# Altium PCB Mesanin.PcbDoc (part 2 of 2)
Units mm, origin at the board's own origin, x right, y up, seen from the top; angles counter-clockwise.
Board outline 85.5 x 78 mm, 4 copper layers (Top Layer, GND, UCCio, UCC), stack 0.602 mm thick; 40 components, 123 nets, 448 pads, 167 vias.
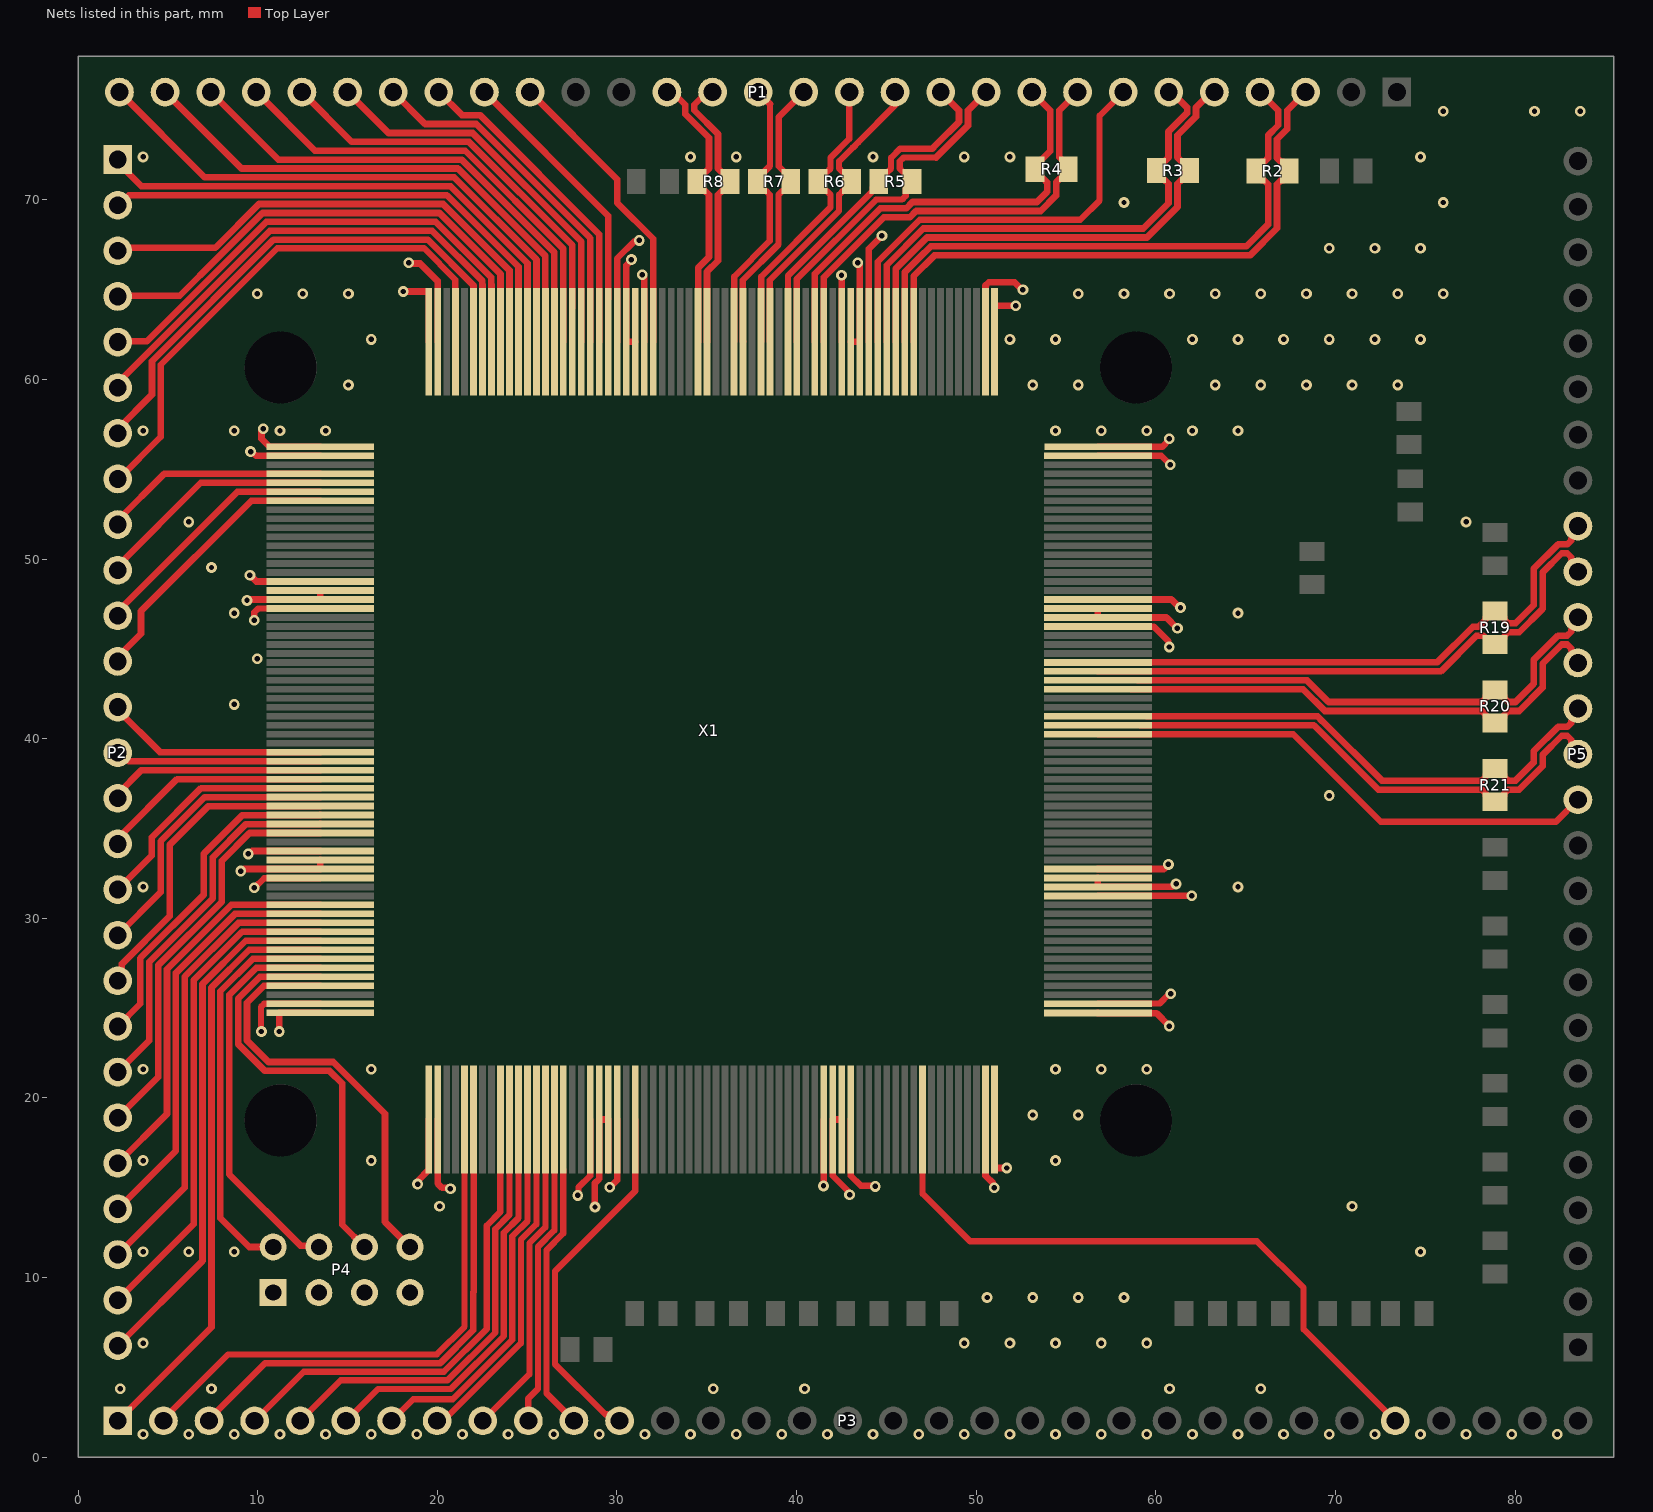
[diagram p4: the nets of this part, all layers, seen from the top]

## Via types
v1: diameter 0.6, hole 0.3, Top Layer to UCC, 167 vias

## Nets (pads, with @x,y where several pads share a name; then routed paths per layer and width w, separated by ;. In a path a pad name is that pad's centre, name@x,y a point inside that pad or via, vN(x,y) a via of type N, cw(c..) or ccw(c..) an arc to the next point about the centre after c; other vN are vias at no path point) (continued)
adci2_4_N: P5.19 R19.1 X1.232 | length 32
  Top Layer w0.37: X1.232@56.775,44.248 67.359,44.248 67.363,44.251 67.799,44.251 67.802,44.248 75.662,44.248 77.642,46.228 77.958,46.228 78.372,46.642 78.372,46.76 78.712,47.1 R19.1@78.887,47.1 79.062,47.1 79.402,46.76 79.402,46.642 79.619,46.425 80.026,46.425 81.035,47.433 81.035,49.458 82.397,50.82 82.91,50.82 83.127,51.037 83.127,51.134 83.5,51.507 P5.19@83.5,51.84
adci2_4_P: P5.18 R19.2 X1.231 | length 31.8
  Top Layer w0.37: X1.231@56.775,43.748 67.589,43.748 67.592,43.751 67.595,43.748 75.87,43.748 77.849,45.728 78.235,45.728 78.712,45.25 R19.2@78.887,45.25 79.062,45.25 79.402,45.59 79.402,45.708 79.619,45.925 80.234,45.925 81.535,47.226 81.535,49.251 82.604,50.32 82.91,50.32 83.127,50.103 83.127,50.006 83.5,49.633 P5.18@83.5,49.3
adci2_5_N: P5.17 R20.1 X1.230 | length 28.7
  Top Layer w0.37: X1.230@59,43.248 68.415,43.248 69.619,42.044 78.156,42.044 78.372,42.26 78.372,42.379 78.712,42.719 R20.1@78.887,42.719 79.062,42.719 79.402,42.379 79.402,42.26 79.619,42.044 80.026,42.044 81.035,43.052 81.035,44.378 82.397,45.74 82.91,45.74 83.127,45.957 83.127,46.054 83.5,46.427 P5.17@83.5,46.76
adci2_5_P: P5.16 R20.2 X1.229 | length 29
  Top Layer w0.37: X1.229@58.647,42.748 68.208,42.748 69.412,41.544 78.156,41.544 78.372,41.327 78.372,41.209 78.712,40.869 R20.2@78.887,40.869 79.062,40.869 79.402,41.209 79.402,41.327 79.619,41.544 80.234,41.544 81.535,42.845 81.535,44.171 82.604,45.24 82.91,45.24 83.127,45.023 83.127,44.926 83.5,44.553 P5.16@83.5,44.22
adci2_6_N: P5.15 R21.1 X1.226 | length 28.5
  Top Layer w0.37: X1.226@59.5,41.248 69.005,41.248 69.288,40.964 69.292,40.964 72.594,37.662 78.156,37.662 78.372,37.879 78.372,37.997 78.712,38.337 R21.1@78.887,38.337 79.062,38.337 79.402,37.997 79.402,37.879 79.619,37.662 80.026,37.662 81.035,38.671 81.035,39.298 82.397,40.66 82.91,40.66 83.127,40.877 83.127,40.974 83.5,41.347 P5.15@83.5,41.68
adci2_6_P: P5.14 R21.2 X1.225 | length 28.8
  Top Layer w0.37: X1.225@59.147,40.748 68.802,40.748 72.387,37.162 78.156,37.162 78.372,36.946 78.372,36.827 78.712,36.487 R21.2@78.887,36.487 79.062,36.487 79.402,36.827 79.402,36.946 79.619,37.162 80.234,37.162 81.535,38.464 81.535,39.091 82.604,40.16 82.91,40.16 83.127,39.943 83.127,39.846 83.5,39.473 P5.14@83.5,39.14
adci3_0_N: P1.17 R8.2 X1.34 | length 16
  Top Layer w0.37: P1.17@32.78,76 33.096,76 33.8,75.296 33.8,74.783 35.125,73.458 35.125,71.748 34.908,71.531 34.79,71.531 34.45,71.191 R8.2@34.45,71.016 34.45,70.841 34.79,70.501 34.908,70.501 35.125,70.284 35.125,66.82 34.515,66.21 X1.34@34.515,62.1
adci3_0_P: P1.16 R8.1 X1.33 | length 16
  Top Layer w0.37: X1.33@35.015,62.1 35.015,66.003 35.625,66.613 35.625,70.284 35.842,70.501 35.96,70.501 36.3,70.841 R8.1@36.3,71.016 36.3,71.191 35.96,71.531 35.842,71.531 35.625,71.748 35.625,73.665 34.3,74.99 34.3,75.296 35.004,76 P1.16@35.32,76
adci3_1_N: P1.15 R7.2 X1.30 | length 15.7
  Top Layer w0.35: X1.30@36.515,62.1 36.525,62.11 36.525,65.728 38.51,67.713 38.51,70.286 38.305,70.491 38.175,70.491 37.825,70.841 37.825,71.191 38.52,71.886 38.52,74.392 38.513,74.399 38.513,74.802 38.52,74.809 38.52,75.34
  Top Layer w0.37: P1.15@37.86,76 38.52,75.34
adci3_1_p: P1.14 R7.1 X1.29 | length 16
  Top Layer w0.35: X1.29@37.025,62.111 X1.29@37.015,62.1 37.005,62.11 37.005,65.529 38.99,67.514 38.99,70.286 39.195,70.491 39.325,70.491 39.675,70.841 39.675,71.191 39,71.865 39,74.6
  Top Layer w0.37: 39,74.6 P1.14@40.4,76
adci3_2_n: P1.12 R6.2 X1.26 | length 17.5
  Top Layer w0.35: X1.26@38.515,62.1 38.505,62.11 38.505,65.529 42.365,69.389 42.365,70.286 42.57,70.491 42.7,70.491 43.05,70.841 R6.2@43.05,71.016 43.05,71.191 42.7,71.541 42.57,71.541 42.365,71.746 42.365,72.145 43.132,72.912 43.142,72.912 43.427,73.197 43.427,73.207 P1.12@45.48,75.26
  Top Layer w0.37: P1.12@45.48,75.26 P1.12@45.48,76
adci3_2_p: P1.13 R6.1 X1.27 | length 16.7
  Top Layer w0.35: X1.27@38.015,62.1 38.025,62.11 38.025,65.728 41.885,69.588 41.885,70.286 41.68,70.491 41.55,70.491 41.2,70.841 R6.1@41.2,71.016 41.2,71.191 41.55,71.541 41.68,71.541 41.885,71.746 41.885,72.344 42.94,73.399
  Top Layer w0.37: 42.94,73.399 P1.13@42.94,76
adci3_3_n: P1.11 R5.2 X1.24 | length 19.4
  Top Layer w0.35: X1.24@39.515,62.1 39.525,62.11 39.525,65.79 44.225,70.49 44.225,70.666 R5.2@44.575,71.016 44.575,71.191 44.925,71.541 45.055,71.541 45.26,71.746 45.26,72.344 45.756,72.839 47.539,72.839
  Top Layer w0.37: 47.539,72.839 47.8,73.1 49.04,74.34 49.04,74.98 P1.11@48.02,76
adci3_3_p: P1.10 R5.1 X1.23 | length 20.8
  Top Layer w0.35: X1.23@40.015,62.1 40.005,62.11 40.005,65.591 44.428,70.014 45.87,70.014 46.075,70.219 46.075,70.841 46.425,71.191 46.075,71.541 45.945,71.541 45.74,71.746 45.74,72.145 45.955,72.359 47.331,72.359 47.338,72.352 47.741,72.352 47.748,72.359 47.767,72.359
  Top Layer w0.37: 47.767,72.359 49.54,74.133 49.54,74.98 P1.10@50.56,76
adci3_4_n: P1.8 R4.2 X1.20 | length 25.1
  Top Layer w0.37: X1.20@41.515,62.1 41.515,65.68 44.864,69.03 45.062,69.03 45.065,69.027 46.303,69.027 46.653,69.377 53.589,69.377 54.45,70.238 54.45,70.968 54.667,71.185 54.785,71.185 55.125,71.525 55.125,71.875 54.62,72.38 54.62,74.98 P1.8@55.64,76
adci3_4_p: P1.9 R4.1 X1.21 | length 25.3
  Top Layer w0.37: X1.21@41.015,62.1 41.015,65.888 44.654,69.527 46.1,69.527 46.451,69.877 53.382,69.877 53.95,70.445 53.95,70.968 53.733,71.185 53.615,71.185 53.275,71.525 53.275,71.875 54.12,72.72 54.12,74.98 P1.9@53.1,76
adci3_5_n: P1.5 R3.1 X1.12 | length 29.2
  Top Layer w0.37: X1.12@45.515,62.1 45.515,66.156 47.262,67.903 59.507,67.903 61.207,69.602 61.207,70.896 61.423,71.113 61.542,71.113 61.882,71.453 R3.1@61.882,71.628 61.882,71.803 61.542,72.143 61.423,72.143 61.207,72.36 61.207,73.598 62.24,74.631 62.24,75.145 63.095,76 P1.5@63.26,76
adci3_5_p: P1.6 R3.2 X1.13 | length 29.2
  Top Layer w0.37: X1.13@45.015,62.1 45.015,66.363 47.055,68.403 59.3,68.403 60.707,69.81 60.707,70.896 60.49,71.113 60.372,71.113 60.032,71.453 R3.2@60.032,71.628 60.032,71.803 60.372,72.143 60.49,72.143 60.707,72.36 60.707,73.805 61.74,74.838 61.74,75.145 60.885,76 P1.6@60.72,76
adci3_6_n: P1.4 R2.2 X1.11 | length 33.9
  Top Layer w0.37: X1.11@46.015,62.1 46.015,65.956 47.129,67.07 47.133,67.07 47.471,67.408 65.033,67.408 66.25,68.625 66.25,70.868 66.033,71.085 65.915,71.085 65.575,71.425 R2.2@65.575,71.6 65.575,71.775 65.915,72.115 66.033,72.115 66.25,72.332 66.25,73.585 66.82,74.155 66.82,74.98 P1.4@65.8,76
adci3_6_p: P1.3 R2.1 X1.10 | length 33.9
  Top Layer w0.37: X1.10@46.515,62.1 46.515,65.749 47.67,66.904 47.675,66.904 47.679,66.908 65.24,66.908 66.75,68.418 66.75,70.868 66.967,71.085 67.085,71.085 67.425,71.425 R2.1@67.425,71.6 67.425,71.775 67.085,72.115 66.967,72.115 66.75,72.332 66.75,73.377 67.32,73.947 67.32,74.98 P1.3@68.34,76
clk_60: P3.2 X1.133 | length 30.5
  Top Layer w0.35: P3.2@4.745,2.02 4.745,2.105 8.359,5.719 19.964,5.719 21.515,7.27 X1.133@21.515,18.798
eno: P1.20 X1.39 | length 16.7
  Top Layer w0.37: P1.20@25.16,76 30.009,71.151 30.009,69.841 32.014,67.836 X1.39@32.015,62.1
gnd: P4.5 X1.1 X1.16 X1.17 X1.41 X1.42 X1.64 X1.65 X1.81 X1.82 X1.111 X1.112 X1.128 X1.129 X1.148 X1.149 X1.174 X1.175 X1.192 X1.193 X1.207 X1.208 X1.237 X1.238 X1.256 | length 73.6
  Top Layer w0.37: v1(9.053,32.627) 9.115,32.627 9.236,32.748 X1.112@13.475,32.748 X1.111@13.475,33.248 ; v1(9.4,47.7) 9.462,47.7 9.51,47.748 X1.82@13.475,47.748 ; v1(10.3,57.25) 10.3,57.188 10.208,57.096 10.208,56.702 10.66,56.25 13.472,56.25 X1.65@13.475,56.248 ; v1(11.2,23.7) 11.2,24.745 11.202,24.748 X1.128@13.475,24.748 ; X1.82@13.475,47.749 X1.81@13.475,48.248 ; v1(18.1,64.9) 19.512,64.9 19.515,64.898 X1.64@19.515,62.1 ; v1(18.9,15.2) 18.944,15.244 18.944,15.414 19.515,15.985 X1.129@19.515,18.798 ; v1(28.776,13.924) 28.756,13.944 28.756,15.235 29.012,15.492 29.012,18.795 X1.148@29.015,18.798 X1.149@29.515,18.798 X1.149@29.515,15.985 ; v1(30.802,66.673) 30.802,66.628 30.515,66.341 X1.42@30.515,62.1 X1.41@31.015,62.1 ; X1.174@42.015,18.798 X1.175@42.515,18.798 ; X1.174@42.015,18.797 42.015,15.668 42.906,14.778 42.906,14.651 v1(42.95,14.607) ; X1.17@43.015,62.1 X1.16@43.515,62.1 43.515,66.323 43.4,66.438 v1(43.4,66.5) ; X1.192@51.015,18.798 51.015,16.103 51.017,16.1 v1(51.7,16.1) ; X1.1@51.015,62.1 51.015,64.097 51.017,64.1 v1(52.2,64.1) ; X1.193@56.775,24.724 56.777,24.721 60.029,24.721 v1(60.75,24) ; X1.207@56.775,31.748 X1.208@56.775,32.248 ; X1.237@56.775,46.748 X1.238@56.775,47.248 ; X1.207@56.775,31.748 60.898,31.748 61.065,31.915 v1(61.127,31.915) ; X1.237@56.775,46.747 60.588,46.747 61.185,46.15 v1(61.2,46.15) ; X1.256@56.8,56.249 60.355,56.249 60.75,56.644 v1(60.75,56.7)
  other v1: 3.615,1.27 6.155,1.27 8.695,1.27 11.235,1.27 13.775,1.27 16.315,1.27 18.855,1.27 21.395,1.27 23.935,1.27 26.475,1.27 29.015,1.27 31.555,1.27 34.095,1.27 36.635,1.27 39.175,1.27 41.715,1.27 44.255,1.27 46.795,1.27 49.335,1.27 51.875,1.27 54.415,1.27 56.955,1.27 59.495,1.27 62.035,1.27 64.575,1.27 67.115,1.27 69.655,1.27 72.195,1.27 74.735,1.27 77.275,1.27 79.815,1.27 82.355,1.27 2.345,3.81 7.425,3.81 35.365,3.81 40.445,3.81 60.765,3.81 65.845,3.81 3.615,6.35 49.335,6.35 51.875,6.35 54.415,6.35 56.955,6.35 59.495,6.35 50.605,8.89 53.145,8.89 55.685,8.89 58.225,8.89 3.615,11.43 6.155,11.43 8.695,11.43 74.735,11.43 20.125,13.97 70.925,13.97 3.615,16.51 16.315,16.51 54.415,16.51 53.145,19.05 55.685,19.05 3.615,21.59 16.315,21.59 54.415,21.59 56.955,21.59 59.495,21.59 3.615,31.75 64.575,31.75 69.655,36.83 8.695,41.91 9.965,44.45 8.695,46.99 64.575,46.99 7.425,49.53 6.155,52.07 77.275,52.07 3.615,57.15 8.695,57.15 11.235,57.15 13.775,57.15 54.415,57.15 56.955,57.15 59.495,57.15 62.035,57.15 64.575,57.15 15.045,59.69 53.145,59.69 55.685,59.69 63.305,59.69 65.845,59.69 68.385,59.69 70.925,59.69 73.465,59.69 16.315,62.23 51.875,62.23 54.415,62.23 62.035,62.23 64.575,62.23 67.115,62.23 69.655,62.23 72.195,62.23 74.735,62.23 9.965,64.77 12.505,64.77 15.045,64.77 55.685,64.77 58.225,64.77 60.765,64.77 63.305,64.77 65.845,64.77 68.385,64.77 70.925,64.77 73.465,64.77 76.005,64.77 69.655,67.31 72.195,67.31 74.735,67.31 58.225,69.85 76.005,69.85 3.615,72.39 34.095,72.39 36.635,72.39 44.255,72.39 49.335,72.39 51.875,72.39 74.735,72.39 76.005,74.93 81.085,74.93 83.625,74.93
lack0: P2.14 X1.100 | length 11.5
  Top Layer w0.37: P2.14@2.2,39.22 2.359,39.22 2.832,38.748 X1.100@13.475,38.748
lack1: P2.24 X1.117 | length 23.9
  Top Layer w0.37: P2.24@2.2,13.82 5.44,17.06 5.44,26.96 8.728,30.248 X1.117@13.475,30.248
lclk0: P2.13 X1.99 | length 12.4
  Top Layer w0.37: P2.13@2.2,41.76 2.2,41.6 4.55,39.25 13.472,39.25 X1.99@13.475,39.248
lclk1: P2.23 X1.116 | length 22
  Top Layer w0.37: P2.23@2.2,16.36 4.945,19.105 4.945,27.165 8.528,30.748 X1.116@13.475,30.748
link0_0: P2.15 X1.101 | length 12.1
  Top Layer w0.37: P2.15@2.2,36.68 2.2,36.92 3.528,38.248 X1.101@13.475,38.248
link0_1: P2.16 X1.102 | length 12.9
  Top Layer w0.37: P2.16@2.2,34.14 2.2,34.439 5.509,37.748 X1.102@13.475,37.748
link0_2: P2.17 X1.103 | length 14.2
  Top Layer w0.37: P2.17@2.2,31.6 4.1,33.5 4.1,34.5 6.847,37.248 X1.103@13.475,37.248
link0_3: P2.18 X1.104 | length 16.1
  Top Layer w0.37: P2.18@2.2,29.06 4.595,31.455 4.595,34.295 7.047,36.748 X1.104@13.475,36.748
link0_4: P2.19 X1.105 | length 18
  Top Layer w0.37: P2.19@2.2,26.52 2.435,26.755 2.435,27.455 5.09,30.11 5.09,34.09 7.247,36.248 X1.105@13.475,36.248
link0_5: P2.20 X1.106 | length 19
  Top Layer w0.37: P2.20@2.2,23.98 3.46,25.24 3.46,27.78 7,31.32 7,33.6 9.145,35.745 13.472,35.745 X1.106@13.475,35.748
link0_6: P2.21 X1.107 | length 20.9
  Top Layer w0.37: P2.21@2.2,21.44 3.955,23.195 3.955,27.575 7.5,31.12 7.5,33.4 9.345,35.245 13.472,35.245 X1.107@13.475,35.248
link0_7: P2.22 X1.108 | length 22.8
  Top Layer w0.37: P2.22@2.2,18.9 4.45,21.15 4.45,27.37 8,30.92 8,33.2 9.548,34.748 X1.108@13.475,34.748
link1_0: P2.25 X1.118 | length 25.8
  Top Layer w0.37: P2.25@2.2,11.28 5.935,15.015 5.935,26.755 8.928,29.748 X1.118@13.475,29.748
link1_1: P2.26 X1.119 | length 27.7
  Top Layer w0.37: P2.26@2.2,8.74 6.43,12.97 6.43,26.55 9.128,29.248 X1.119@13.475,29.248
link1_2: P2.27 X1.120 | length 29.6
  Top Layer w0.37: P2.27@2.2,6.2 6.925,10.925 6.925,26.345 9.328,28.748 X1.120@13.475,28.748
link1_3: P3.1 X1.121 | length 33.2
  Top Layer w0.37: P3.1@2.205,2.02 7.42,7.234 7.42,25.44 7.42,26.14 9.528,28.248 X1.121@13.475,28.248
link1_4: P4.2 X1.122 | length 22.5
  Top Layer w0.37: P4.2@10.86,11.7 9.525,11.7 7.915,13.31 7.915,25.235 7.915,25.935 9.728,27.748 X1.122@13.475,27.748
link1_5: P4.4 X1.123 | length 22.3
  Top Layer w0.37: P4.4@13.4,11.7 13.322,11.778 12.372,11.778 8.41,15.74 8.41,25.73 9.925,27.245 13.472,27.245 X1.123@13.475,27.248
link1_6: P4.6 X1.124 | length 23.9
  Top Layer w0.37: X1.124@13.475,26.748 10.128,26.748 8.905,25.525 8.905,24.32 8.905,22.995 10.395,21.505 11.72,21.505 13.995,21.505 14.7,20.8 14.7,12.94 P4.6@15.94,11.7
link1_7: P4.8 X1.125 | length 23.9
  Top Layer w0.37: X1.125@13.475,26.248 13.472,26.245 10.347,26.245 9.4,25.298 9.4,23.2 10.6,22 14.2,22 17.08,19.12 17.08,13.1 P4.8@18.48,11.7
nrst: P2.12 X1.71 | length 15.9
  Top Layer w0.37: P2.12@2.2,44.3 2.2,44.54 3.5,45.84 3.5,47.1 9.645,53.245 13.472,53.245 X1.71@13.475,53.248
nstc: P3.3 X1.134 | length 28.6
  Top Layer w0.37: P3.3@7.285,2.02 7.285,2.105 10.414,5.234 20.165,5.234 22,7.069 22,9.184 22.017,9.202 22.017,18.795 X1.134@22.015,18.798
ovr_0: P3.12 X1.152 | length 20.4
  Top Layer w0.35: P3.12@30.145,2.02 29.807,2.02 29.44,2.387 29.339,2.387 26.55,5.176 26.55,10.35 31.015,14.815 X1.152@31.015,18.798
ovr_1: P3.29 X1.184 | length 34.7
  Top Layer w0.35: X1.184@47.025,16.5 47.015,16.49 47.015,14.662 47.048,14.629 49.654,12.023 65.627,12.023 68.225,9.425 68.225,7.12 P3.29@73.325,2.02
ovr_2: P5.13 X1.224 | length 29.2
  Top Layer w0.35: X1.224@56.775,40.248 67.65,40.248 72.516,35.382 82.282,35.382 P5.13@83.5,36.6
ovr_3: P1.7 X1.14 | length 24.8
  Top Layer w0.35: X1.14@44.515,62.1 44.515,66.549 46.856,68.89 55.795,68.89 56.868,69.963 56.868,74.688 P1.7@58.18,76
prti0: P1.21 X1.44 | length 14.4
  Top Layer w0.37: P1.21@22.62,76 29.514,69.106 X1.44@29.514,64.5
prti1: P1.23 X1.46 | length 20.1
  Top Layer w0.37: P1.23@17.54,76 19.32,74.22 22.166,74.22 28.515,67.871 X1.46@28.515,62.1
prti2: P1.25 X1.48 | length 22.1
  Top Layer w0.37: P1.25@12.46,76 15.23,73.23 21.756,73.23 27.515,67.471 X1.48@27.515,64
prti3: P1.27 X1.50 | length 27.8
  Top Layer w0.37: P1.27@7.38,76 11.14,72.24 21.346,72.24 26.515,67.071 X1.50@26.515,62.1
prti4: P1.29 X1.52 | length 31.7
  Top Layer w0.37: P1.29@2.3,76 7.05,71.25 20.936,71.25 25.515,66.671 X1.52@25.515,62.1
prti5: P2.2 X1.54 | length 28.4
  Top Layer w0.37: P2.2@2.2,69.7 2.272,69.7 2.832,70.26 20.526,70.26 24.515,66.271 X1.54@24.515,62.1
prti6: P2.4 X1.56 | length 28.4
  Top Layer w0.37: P2.4@2.2,64.62 2.24,64.66 5.66,64.66 7.842,66.842 10.27,69.27 20.116,69.27 23.515,65.871 X1.56@23.515,62.1
prti7: P2.6 X1.58 | length 28.6
  Top Layer w0.37: P2.6@2.2,59.54 2.2,59.8 6.536,64.136 10.68,68.28 19.706,68.28 22.507,65.478 22.507,65.292 22.512,65.287 22.512,62.103 X1.58@22.515,62.1
prto0: P1.22 X1.45 | length 18.2
  Top Layer w0.37: P1.22@20.08,76 21.365,74.715 22.371,74.715 29.015,68.071 X1.45@29.015,62.1
prto1: P1.24 X1.47 | length 22
  Top Layer w0.37: P1.24@15,76 17.275,73.725 21.961,73.725 28.015,67.671 X1.47@28.015,62.1
prto2: P1.26 X1.49 | length 25.9
  Top Layer w0.37: P1.26@9.92,76 13.185,72.735 21.551,72.735 27.015,67.271 X1.49@27.015,62.1
prto3: P1.28 X1.51 | length 29.7
  Top Layer w0.37: P1.28@4.84,76 9.095,71.745 21.141,71.745 26.015,66.871 X1.51@26.015,62.1
prto4: P2.1 X1.53 | length 29.7
  Top Layer w0.37: P2.1@2.2,72.24 2.12,72.16 3.525,70.755 20.731,70.755 25.015,66.471 X1.53@25.015,62.1
prto5: P2.3 X1.55 | length 28.5
  Top Layer w0.37: P2.3@2.2,67.16 2.2,67.337 7.637,67.337 10.065,69.765 20.321,69.765 24.015,66.071 X1.55@24.015,62.1
prto6: P2.5 X1.57 | length 28.4
  Top Layer w0.37: P2.5@2.2,62.08 2.24,62.12 3.82,62.12 8.047,66.347 10.475,68.775 19.911,68.775 23.002,65.683 23.002,65.497 23.007,65.492 23.007,65.292 23.012,65.287 23.012,62.103 X1.57@23.015,62.1
prto7: P2.7 X1.59 | length 29.7
  Top Layer w0.37: P2.7@2.2,57 2.2,57.24 4.115,59.155 4.115,61.015 10.885,67.785 19.46,67.785 22.012,65.233 22.012,62.103 X1.59@22.015,62.1
sck: P2.10 X1.69 | length 13.4
  Top Layer w0.37: P2.10@2.2,49.38 2.2,49.62 6.828,54.248 X1.69@13.475,54.248
sdi: P2.11 X1.70 | length 14.3
  Top Layer w0.37: P2.11@2.2,46.84 2.2,47.08 8.865,53.745 13.472,53.745 X1.70@13.475,53.748
sdo: P2.8 X1.61 | length 30.7
  Top Layer w0.35: P2.8@2.2,54.46 2.26,54.46 4.6,56.8 4.6,60.814 11.086,67.3 19.259,67.3 21.002,65.557 21.002,62.113 X1.61@21.015,62.1
ss: P2.9 X1.68 | length 12.6
  Top Layer w0.37: P2.9@2.2,51.92 2.2,52.16 4.785,54.745 10.547,54.745 13.472,54.745 X1.68@13.475,54.748
strob_0: P3.11 X1.144 | length 15
  Top Layer w0.35: X1.144@27.025,16 27.015,15.99 27.015,12.456 26.075,11.516 26.075,3.55 P3.11@27.605,2.02
strob_1: P3.10 X1.143 | length 17.4
  Top Layer w0.35: P3.10@25.065,2.02 25.065,3.265 25.6,3.8 25.6,11.713 26.515,12.628 X1.143@26.515,18.798
strob_2: P3.9 X1.142 | length 18.2
  Top Layer w0.35: P3.9@22.525,2.02 25.125,4.619 25.125,11.91 26.015,12.8 X1.142@26.015,18.798
strob_3: P3.8 X1.141 | length 19.3
  Top Layer w0.35: P3.8@19.985,2.02 20.324,2.02 24.65,6.346 24.65,12.106 25.515,12.971 X1.141@25.515,18.798
strob_4: P3.7 X1.140 | length 18.4
  Top Layer w0.35: P3.7@17.445,2.02 18.655,3.229 20.861,3.229 24.175,6.543 24.175,12.303 25.015,13.143 X1.140@25.015,15.99
strob_5: P3.6 X1.139 | length 23.1
  Top Layer w0.35: P3.6@14.905,2.02 14.92,2.02 16.699,3.799 20.759,3.799 23.7,6.739 23.7,12.5 24.515,13.315 X1.139@24.515,18.798
strob_6: P3.5 X1.138 | length 25.1
  Top Layer w0.35: P3.5@12.365,2.02 14.62,4.274 20.563,4.274 23.225,6.936 23.225,12.697 24.015,13.487 X1.138@24.015,18.798
strob_7: P3.4 X1.137 | length 27
  Top Layer w0.35: P3.4@9.825,2.02 12.555,4.749 20.366,4.749 22.75,7.133 22.75,12.893 23.504,13.648 23.504,18.787 X1.137@23.515,18.798
Ucc: P4.7 X1.2 X1.15 X1.40 X1.63 X1.80 X1.110 X1.130 X1.150 X1.176 X1.191 X1.209 X1.239 | length 54.9
  Top Layer w0.37: v1(9.475,33.585) 9.537,33.585 9.7,33.748 X1.110@13.475,33.748 ; v1(9.56,49.095) 9.576,49.095 9.923,48.748 X1.80@13.475,48.748 ; v1(18.4,66.5) 18.444,66.456 19.042,66.456 20.014,65.483 X1.63@20.014,62.101 ; X1.130@20.014,18.797 20.014,15.243 20.266,14.991 20.683,14.991 v1(20.727,14.947) ; v1(29.6,15.025) 29.607,15.025 30.014,15.433 X1.150@30.014,18.797 ; v1(31.402,65.825) 31.402,65.763 31.514,65.651 X1.40@31.515,62.1 ; X1.176@43.015,18.798 43.017,18.795 43.017,15.669 43.57,15.117 44.329,15.117 v1(44.373,15.073) ; X1.15@44.015,62.1 44.015,67.265 v1(44.75,68) ; X1.2@50.515,62.1 50.517,62.103 50.517,65.228 50.699,65.41 52.128,65.41 52.538,65 v1(52.6,65) ; X1.191@50.515,18.797 50.515,15.668 50.956,15.228 50.956,15.044 v1(51,15) ; X1.209@56.775,32.748 60.448,32.748 v1(60.7,33) ; X1.239@56.775,47.748 60.865,47.748 61.313,47.3 v1(61.375,47.3)
Uccio: P4.1 P4.3 X1.18 X1.43 X1.66 X1.83 X1.113 X1.127 X1.147 X1.173 X1.194 X1.206 X1.236 X1.255 | length 53.4
  Top Layer w0.35: v1(9.6,55.982) 9.667,55.982 9.902,55.748 X1.66@13.475,55.748 ; v1(9.8,31.7) 9.816,31.7 10.351,32.235 13.462,32.235 X1.113@13.475,32.248 ; v1(9.8,46.6) 9.811,46.611 9.811,47.042 10.016,47.248 X1.83@13.475,47.248 ; v1(10.2,23.7) 10.175,23.725 10.175,25.059 10.351,25.235 13.462,25.235 X1.127@13.475,25.248 ; v1(27.81,14.573) 27.858,14.621 27.858,15.026 28.504,15.672 28.504,18.787 X1.147@28.515,18.798 ; X1.43@30.015,62.1 30.015,66.737 30.972,67.694 31.194,67.694 v1(31.242,67.742) ; v1(41.5,15.1) 41.507,15.107 41.507,18.79 X1.173@41.515,18.798 ; v1(42.5,65.8) 42.507,65.793 42.507,62.107 X1.18@42.515,62.1 ; X1.194@56.775,25.248 56.785,25.258 60.215,25.258 60.757,25.8 v1(60.825,25.8) ; X1.206@56.775,31.248 56.776,31.249 v1(62,31.25) v1(62,31.25) ; X1.236@56.775,46.248 56.785,46.237 59.9,46.237 60.704,45.433 60.704,45.15 v1(60.752,45.102) ; X1.255@56.775,55.748 60.3,55.748 60.797,55.25 v1(60.8,55.25)
pads on no net: *1.0 X1.3 X1.4 X1.5 X1.6 X1.7 X1.19 X1.22 X1.25 X1.28 X1.31 X1.32 X1.35 X1.36 X1.60 X1.62 X1.67 X1.72 X1.73 X1.74 X1.75 X1.76 X1.77 X1.78 X1.79 X1.84 X1.85 X1.86 X1.87 X1.88 X1.89 X1.90 X1.91 X1.92 X1.93 X1.94 X1.95 X1.96 X1.97 X1.98 X1.109 X1.114 X1.115 X1.126 X1.131 X1.132 X1.135 X1.136 X1.145 X1.146 X1.151 X1.159 X1.160 X1.163 X1.164 X1.171 X1.172 X1.177 X1.178 X1.179 X1.180 X1.183 X1.189 X1.190 X1.195 X1.196 X1.197 X1.198 X1.201 X1.202 X1.205 X1.210 X1.213 X1.214 X1.219 X1.220 X1.223 X1.227 X1.228 X1.233 X1.234 X1.235 X1.244 X1.247 X1.248 X1.251 X1.252 X1.253 X1.254

## Polygon pours and split planes (outlines as drawn)
gnd on Top Layer "Top Overlay-No Net" (solid, remove dead copper, pour order 14): 0,78 0,0 85.5,0 85.5,78
Uccio on UCCio "NONET_L-01_P-001" (solid, remove dead copper, pour order 12): 0.5,77.501 85,77.499 85,0.5 0.5,0.5
Ucc on UCC "NONET_L-01_P-001" (solid, remove dead copper, pour order 13): 0.5,77.5 85,77.5 85,0.5 0.5,0.5
gnd on GND "NONET_L-01_P-001" (solid, remove dead copper, pour order 11): 0.5,77.5 85,77.5 85,0.5 0.5,0.5

## Keep-outs
Keep-Out Layer:
  lines w0.254: 0,0 85.5,0 85.5,78 0,78 0,0 ; 18.265,23.692 18.265,57.55 52.175,57.55 52.175,23.692 18.265,23.692

## Other copper
Multi-Layer:
  pour cut-out: 8.65,63.05 13.9,63.05 13.9,58.3 8.65,58.3
  pour cut-out: 56.15,63.05 61.4,63.05 61.4,58.3 56.15,58.3
  pour cut-out: 56.25,21.15 61.5,21.15 61.5,16.4 56.25,16.4
  pour cut-out: 8.75,21.075 14,21.075 14,16.325 8.75,16.325
  pour cut-out: 17.75,57.866 52.75,57.866 52.749,57.865 52.749,23.099 17.75,23.134

## Silkscreen, mask and mechanical layers (free items; w line width, h text height)
Top Overlay:
  lines w0.15: 76.65,76.7 76.5,76.85 76.5,76.875 76.45,76.875 ; 76.65,77.075 76.45,76.875 ; 80.4,76.875 76.45,76.875
  lines w0.254: 2.8,74.9 3.7,74 ; 9.8,3.2 9.8,3.8 10.4,4.4 ; 23.2,73.4 23.2,74.9 ; 25.379,4.254 26.879,2.754
  text "1" at 78.35,75.35 h1
  text "(prt)i4|o3|i3|o2|...|i0" at 4.15,73.183 h1
  text "prto4" at 4.05,71.983 h1
  text "eno" at 23.7,71.912 h1 r45
  text "i2_0N" at 77.15,71.817 h1
  text "c_3P" at 28.282,71.03 h1 r45
  text "c_3N" at 25.482,70.83 h1 r45
  text "ovr3" at 58.65,70.45 h1 r90
  text "c_2N" at 73.883,69.85 h1 r90
  text "i3_3N" at 48.683,69.75 h1 r90
  text "i3_3P" at 51.183,69.65 h1 r90
  text "prti5" at 4.05,69.483 h1
  text "i2_0P" at 77.25,69.017 h1
  text "prto5" at 4.05,66.983 h1
  text "c_2P" at 71.383,66.55 h1 r90
  text "i2_1N" at 77.2,66.517 h1
  text "i3_4P" at 53.283,65.85 h1 r90
  text "i3_6P" at 68.883,65.85 h1 r90
  text "i3_4N" at 55.983,65.75 h1 r90
  text "i3_5N" at 63.783,65.65 h1 r90
  text "i3_6N" at 66.283,65.65 h1 r90
  text "i3_5P" at 61.083,65.55 h1 r90
  text "i3_1N" at 38.383,65.45 h1 r90
  text "i3_1P" at 41.083,65.45 h1 r90
  text "i3_0P" at 36.083,65.35 h1 r90
  text "i3_2P" at 43.583,65.35 h1 r90
  text "i3_2N" at 46.183,65.35 h1 r90
  text "i3_0N" at 33.283,65.25 h1 r90
  text "prti6" at 3.9,64.458 h1
  text "i2_1P" at 77.425,63.742 h1
  text "prto6" at 4,61.958 h1
  text "i2_2N" at 77.1,61.442 h1
  text "<-1" at 51.837,60.448 h1
  text "prti7" at 4,59.558 h1
  text "i2_2P" at 77.225,58.842 h1
  text "prto7" at 4,56.883 h1
  text "i2_3N" at 77.225,56.217 h1
  text "sdo" at 3.9,54.375 h1
  text "i2_3P" at 77.125,53.692 h1
  text "ss" at 3.9,51.825 h1
  text "i2_4N" at 73.05,50.617 h1
  text "sck" at 3.9,49.1 h1
  text "i2_4P" at 73.1,48.817 h1
  text "sdi" at 3.9,46.475 h1
  text "i2_5N" at 73.05,46.367 h1
  text "nrst" at 3.9,44.05 h1
  text "i2_5P" at 73.125,43.317 h1
  text "lclk0" at 3.9,41.5 h1
  text "i2_6N" at 72.975,41.217 h1
  text "lack0" at 3.9,38.825 h1
  text "i2_6P" at 73.15,38.367 h1
  text "lnk0_0" at 3.9,36.267 h1
  text "ovr2" at 73.775,36.025 h1
  text "5540TH01H4" at 65.625,35.349 h1 r90
  text "lnk0_1" at 3.9,33.792 h1
  text "c_1N" at 73.775,33.542 h1
  text "OPTO_EIC_AAB_VPL" at 66.883,32.35 h1 r90
  text "lnk0_2" at 3.9,31.217 h1
  text "c_1P" at 74.05,30.967 h1
  text "lnk0_3" at 3.9,28.742 h1
  text "i1_0N" at 73.125,28.442 h1
  text "lnk0_4" at 3.9,26.292 h1
  text "i1_0P" at 73.153,26.091 h1
  text ".- i1_5N / ..- i1_5P / ...- i1_6N / ....-i1_6P" at 62.25,24.5 h1
  text "lnk0_5" at 3.9,23.667 h1
  text "i1_1N" at 73.287,23.604 h1
  text "lnk0_6" at 3.9,21.242 h1
  text "i1_1P" at 73.425,20.792 h1
  text "lnk0_7" at 4.088,18.999 h1 r330
  text "i1_2N" at 73.2,18.392 h1
  text "lclk1" at 4.005,16.155 h1 r330
  text "i1_2P" at 73.325,15.992 h1
  text "lack1" at 4.005,13.655 h1 r330
  text "7" at 18.325,13.675 h1
  text "6" at 15.725,13.65 h1
  text "5" at 13.3,13.625 h1
  text "lnk1_4" at 10.672,13.349 h1 r30
  text "i1_3N" at 73.175,13.292 h1
  text "lnk1_0" at 3.988,10.999 h1 r330
  text "i1_3P" at 73.2,10.917 h1
  text "i0_5P" at 38.192,9.376 h1 r90
  text "i0_5N" at 40.793,9.362 h1 r90
  text "i0_1N" at 61.117,9.334 h1 r90
  text "i0_4P" at 43.517,9.276 h1 r90
  text "i0_4N" at 45.892,9.276 h1 r90
  text "i0_3P" at 48.342,9.276 h1 r90
  text "i0_0N" at 66.367,9.276 h1 r90
  text "c_0P" at 68.667,9.242 h1 r90
  text "c_0N" at 71.042,9.242 h1 r90
  text "i0_0P" at 63.692,9.201 h1 r90
  text "i0_6N" at 36.493,8.547 h1 r90
  text "lnk1_1" at 3.988,8.499 h1 r330
  text "i0_6P" at 33.693,8.497 h1 r90
  text "ovr0" at 31.293,8.375 h1 r90
  text "i1_4N" at 77.075,8.067 h1
  text ".- link1_3 / ..- clk_60 / ...- nstc" at 20.1,7.4 h1
  text "UCCio" at 9.8,6.525 h1
  text "G" at 15.625,6.5 h1
  text "lnk1_2" at 3.988,6.399 h1 r330
  text "i1_4P" at 77.2,5.642 h1
  text "UCC" at 17.43,5.405 h1 r30
  text "." at 78.05,4.65 h1 r180
  text ".." at 75.45,4.6 h1
  text ".." at 7.775,4.498 h1 r180
  text "(strob)7|6|5...|0" at 10.65,4.15 h1
  text ".." at 78.875,4.075 h1 r180
  text ".." at 5.057,3.965 h1 r180
  text "ovr1" at 71.75,3.95 h1
  text "." at 1.806,3.939 h1 r180
  text "." at 83.35,3.925 h1
  text ".." at 75.45,3.9 h1
  text "." at 6.937,3.889 h1 r180
  text ".." at 80.425,3.875 h1
  text "i0_2P" at 53.267,3.776 h1 r90
  text "i0_1P" at 58.417,3.784 h1 r90
  text "i0_2N" at 56.017,3.751 h1 r90
  text "i0_3N" at 50.892,3.701 h1 r90